# Altium PCB m12can.PcbDoc
Units mil, origin at the board's own origin, x right, y up, seen from the top; angles counter-clockwise.
Board outline 2000 x 2600 mil, 2 copper layers (Top Layer, Bottom Layer); 11 components, 44 nets, 65 pads, 8 vias.
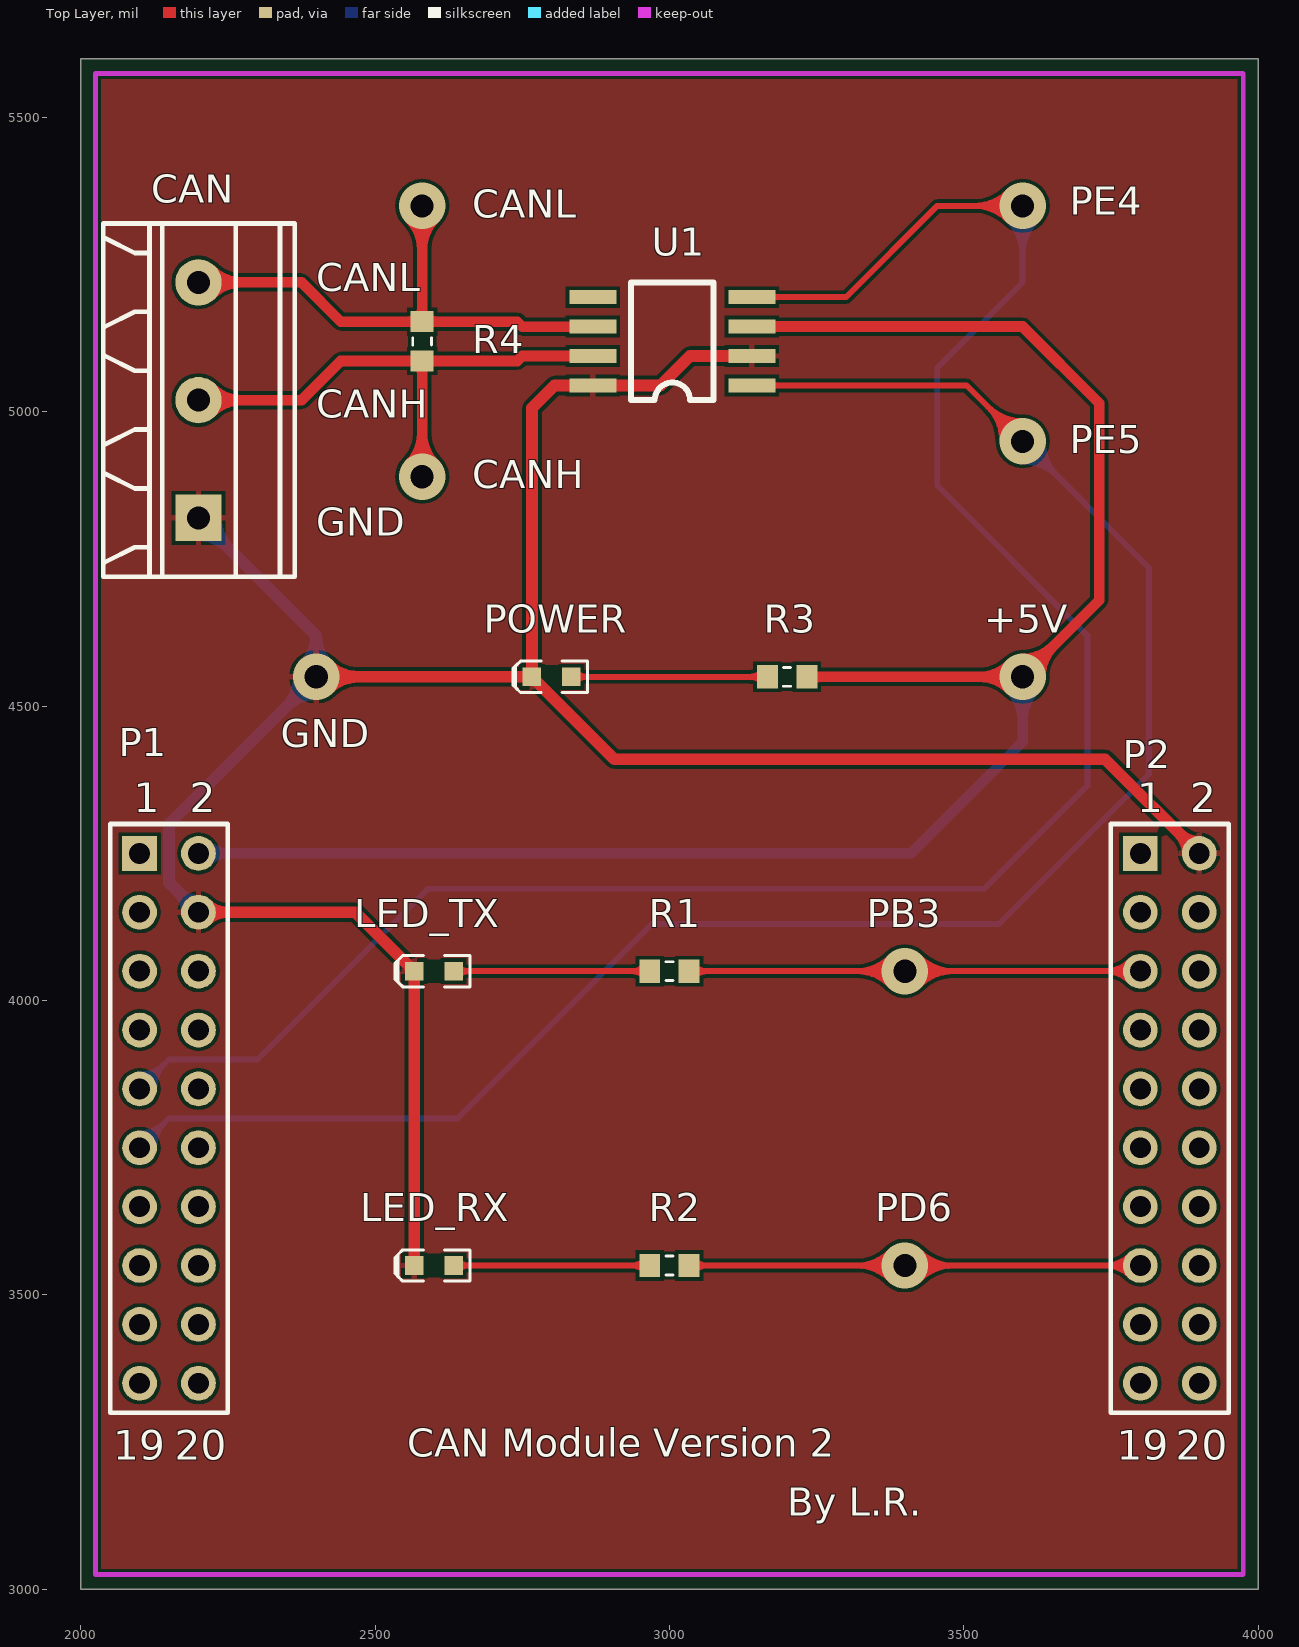
[diagram p0: Top Layer view]
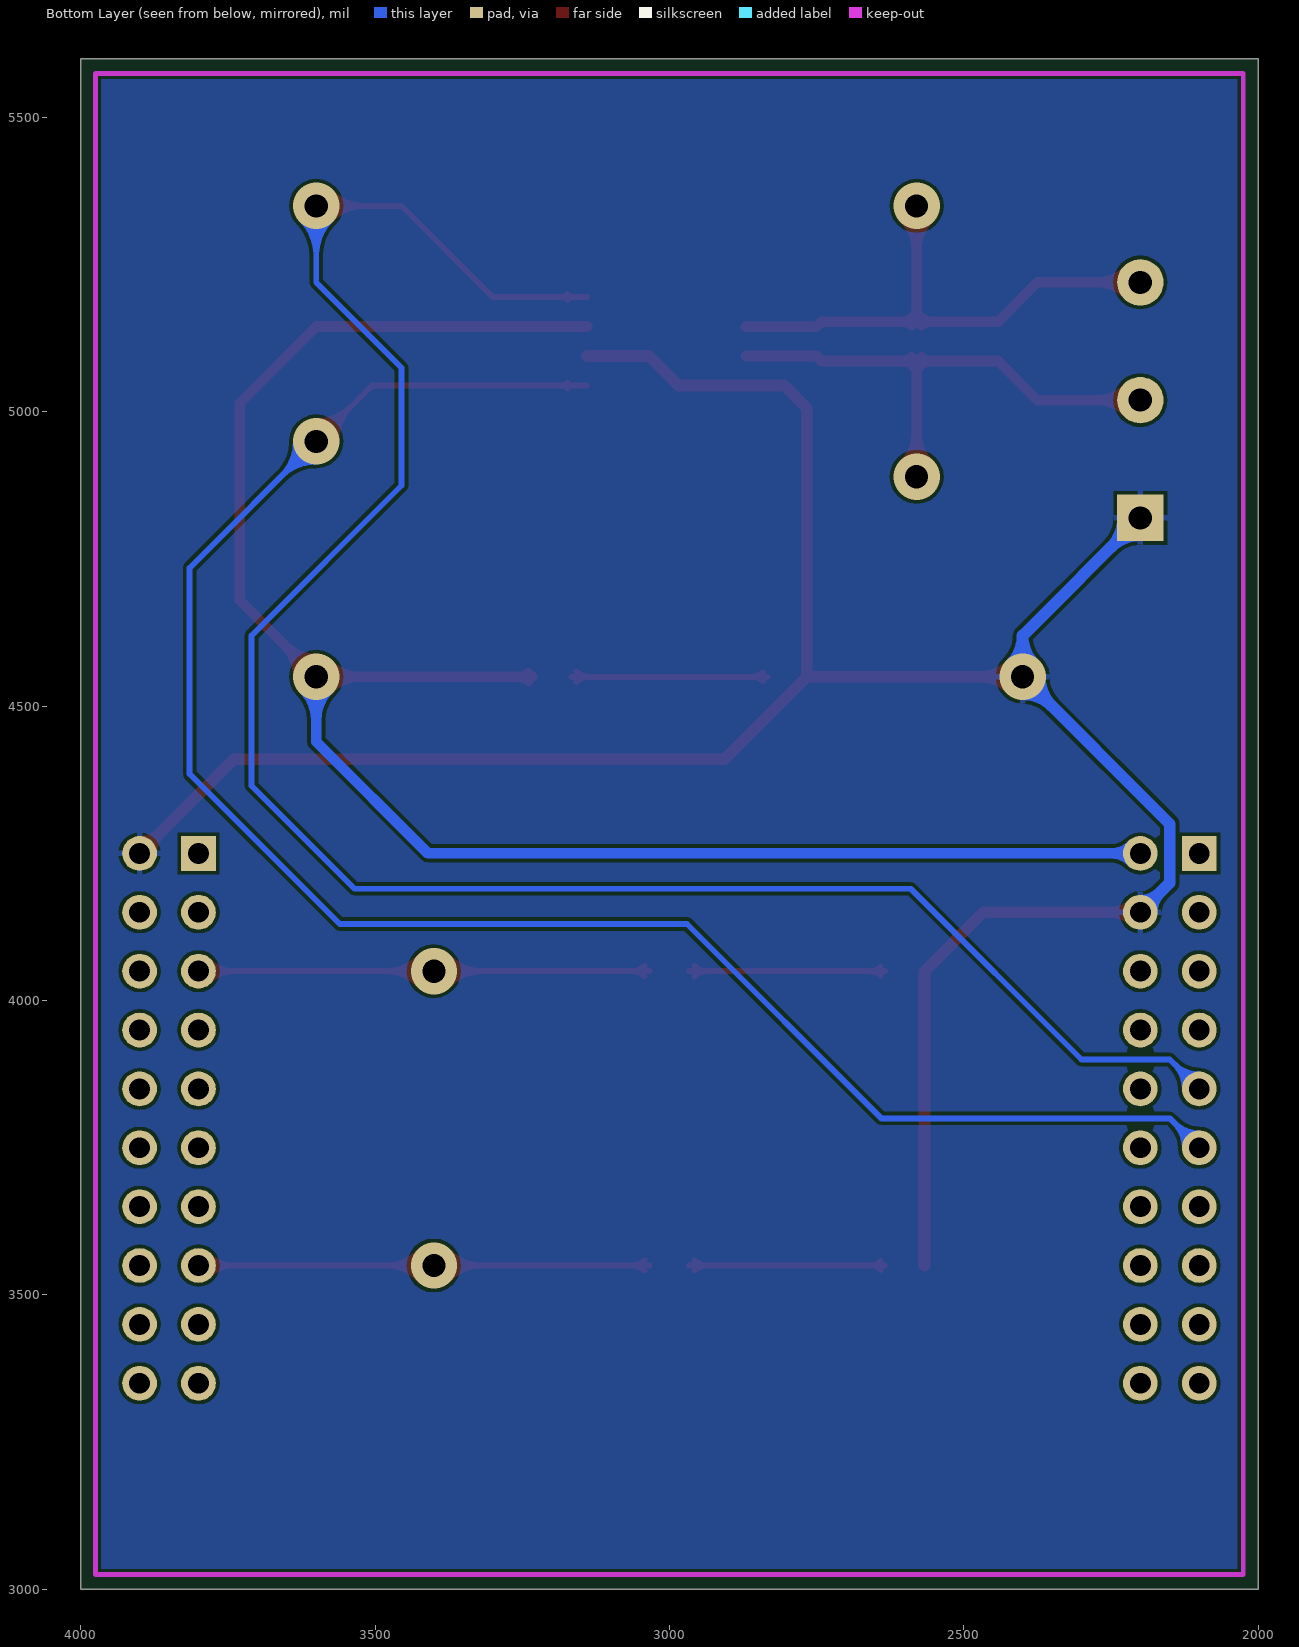
[diagram p1: Bottom Layer view, seen from below]
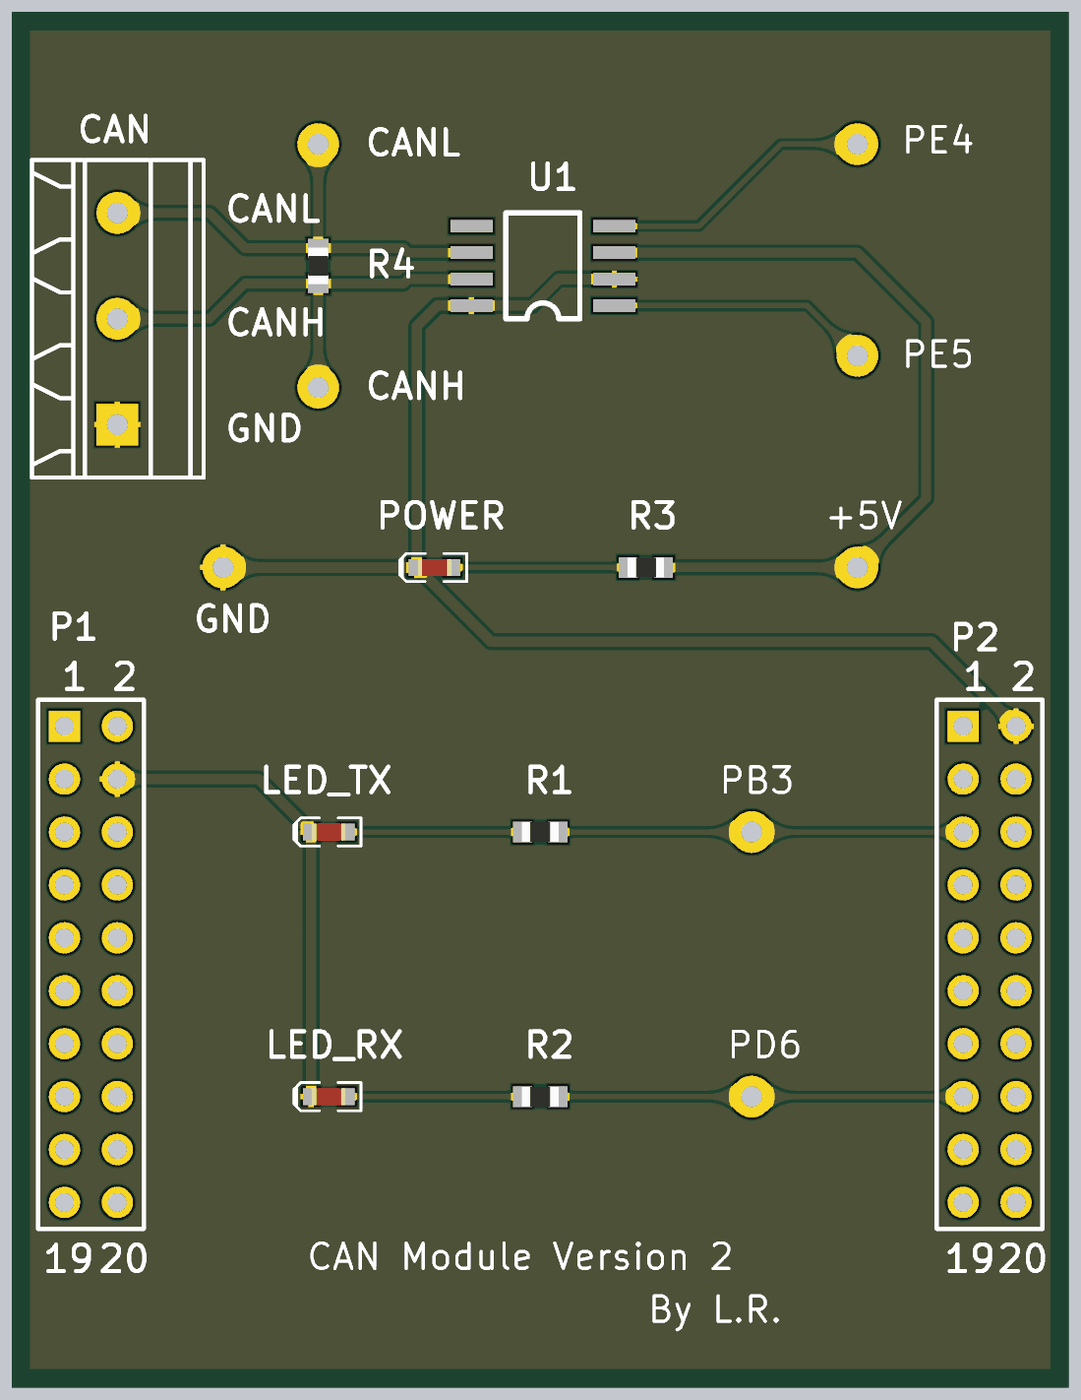
[diagram p2: 3D render of the assembled board from above, using the file's embedded part models]

## Layer stack, top to bottom
Top Layer: signal copper 1.4
Dielectric: dielectric 12.6, FR-4, Dk 4.8
Bottom Layer: signal copper 1.4

## Board outline
2000,3000 4000,3000 4000,5600 2000,5600

## Design rules (kind name [scope] priority, off if disabled: settings)
Clearance [All] p1: gap=6
PolygonConnect [All] p1: connectstyle=Relief reliefconductorwidth=10 reliefentries=4 polygonreliefangle="90 Angle"
RoutingVias VSS [InNet('GND')] p1: holewidth=20 width=32 viastyle="Through Hole" minholewidth=20 minwidth=32 maxholewidth=40 maxwidth=80
RoutingVias V5 [(InNet('CANH') OR InNet('CANL') OR InNet('VBUS'))] p2: holewidth=18 width=30 viastyle="Through Hole" minholewidth=18 minwidth=30 maxholewidth=40 maxwidth=80
RoutingVias [All] p3: holewidth=12 width=24 viastyle="Through Hole" minholewidth=12 minwidth=24 maxholewidth=40 maxwidth=80
SilkscreenOverComponentPads [All] p1: minsilkscreentomaskgap=10
SolderMaskExpansion [All] p1: expansion=4
Width GND [InNet('GND')] p1: maxlimit=22 minlimit=18 preferedwidth=20
Width VCC [(InNet('VBUS') OR InNet('CANH') OR InNet('CANL'))] p2: maxlimit=20 minlimit=16 preferedwidth=18
Width [All] p3: maxlimit=14 minlimit=6 preferedwidth=10
27 further rules are at their usual default settings.

## Components (designator, comment, footprint, x,y, rotation, side; value= is the part's Value field where it differs from the comment)
CAN "CAN" MKDSN_3RMI 2200,4820 r90 top
LED_RX "LED2" LED_0603_RED 2600,3550 r180 top
LED_TX "LED2" LED_0603_RED 2600,4050 r180 top
P1 "Header 10X2" HDR2X10 2100,4250 r270 top
P2 "Header 10X2" HDR2X10 3800,4250 r270 top
POWER "LED2" LED_0603_RED 2800,4550 r180 top
R1 "Res1" RES_0603 3000,4050 r180 top
R2 "Res1" RES_0603 3000,3550 r180 top
R3 "Res1" RES_0603 3200,4550 r180 top
R4 "Res1" RES_0603 2580,5120 r90 top
U1 "SN65HVD1050D" SOIC-8 3140,5045 r180 top

## Footprints (in the part's own frame and the unit in brackets; to place one, negate y for a bottom-side part, rotate by r counter-clockwise, add the part's x,y. Pads: shape width x height; smd on the part's side, far side on the other; paste and mask are expansions set on the pad)
HDR2X10 [mm] "Connector; Header; 10x2 Position"
  rect 1.5x1.5 hole 0.9: 1(0,0)
  round 1.5 hole 0.9: 2(0,2.54) 3(2.54,0) 4(2.54,2.54) 5(5.08,0) 6(5.08,2.54) 7(7.62,0) 8(7.62,2.54) 9(10.16,0) 10(10.16,2.54) 11(12.7,0) 12(12.7,2.54) 13(15.24,0) 14(15.24,2.54) 15(17.78,0) 16(17.78,2.54) 17(20.32,0) 18(20.32,2.54) 19(22.86,0) 20(22.86,2.54)
  silkscreen extent -1.27,-1.27 24.13,3.81
LED_0603_RED [mm]
  rect 0.8x0.8 smd: 1(-0.85,0) 2(0.85,0)
  Top Layer pour cut-out: -0.5,0.5 0.5,0.5 0.5,-0.5 -0.5,-0.5
  silkscreen extent -1.55,-0.68 1.68,0.67, body extent -0.8,-0.4 0.8,0.4, height 0.75
MKDSN_3RMI [mm]
  rect 2x2 hole 1: 1(0,0)
  round 2 hole 1: 2(5.08,0) 3(10.16,0)
  silkscreen extent -2.54,-4.15 12.7,4.11
RES_0603 [mm]
  rect 0.9x1 smd: 1(-0.85,0) 2(0.85,0)
  Top Layer pour cut-out: -0.4,0.6 0.4,0.6 0.4,-0.6 -0.4,-0.6
  silkscreen extent -0.15,-0.41 0.15,0.41, body extent -0.87,-0.47 0.88,0.48, height 0.54
SOIC-8 [mil]
  rect 80x24 smd: 1(0,0) 2(0,-50.06) 3(0,-100.06) 4(0,-150.06) 5(270,-150) 6(270,-100) 7(270,-50) 8(270,0)
  silkscreen extent 65,-175 205,25

## Part data
CAN: library part HEAD3
LED_RX LED_TX POWER: "Typical RED, GREEN, YELLOW, AMBER GaAs LED"
P1 P2: "Header, 10-Pin, Dual row"
R1 R2 R3 R4: "Resistor"
U1: "EMC OPTIMIZED CAN TRANSCEIVER,SN65HVD1050D"

## Via types
v1: diameter 78.74, hole 39.37, Top Layer to Bottom Layer, 8 vias

## Nets (pads, with @x,y where several pads share a name; then routed paths per layer and width w, separated by ;. In a path a pad name is that pad's centre, name@x,y a point inside that pad or via, vN(x,y) a via of type N, cw(c..) or ccw(c..) an arc to the next point about the centre after c; other vN are vias at no path point)
3V3: P1.1
CANH: CAN.2 R4.1 U1.7 | length 1227.1
  Top Layer w18: CAN.2 2375,5020 2441.53,5086.53 R4.1 ; CAN.2@2221.47,4998.53 cw(c2273.32,4946.68) 2273.32,5020 cw(c2273.32,5093.32) CAN.2@2221.47,5041.47 ; v1@2558.53,4911.47 ccw(c2506.68,4963.32) 2580,4963.32 ccw(c2653.32,4963.32) v1@2601.47,4911.47 ; R4.1@2571.87,5080.37 ccw(c2556.99,5065.49) 2556.99,5086.53 ccw(c2556.99,5107.58) R4.1@2571.87,5092.7 ; R4.1@2573.84,5080.37 cw(c2558.96,5065.49) 2580,5065.49 cw(c2601.04,5065.49) R4.1@2586.16,5080.37 ; v1(2580,4890) R4.1 ; R4.1@2588.13,5080.37 cw(c2603.01,5065.49) 2603.01,5086.53 cw(c2603.01,5107.58) R4.1@2588.13,5092.7 ; U1.7 2750,5095 2741.53,5086.53 R4.1
CANL: CAN.3 R4.2 U1.6 | length 1227.1
  Top Layer w18: CAN.3 2375,5220 2441.53,5153.47 R4.2 ; CAN.3@2221.47,5198.53 cw(c2273.32,5146.68) 2273.32,5220 cw(c2273.32,5293.32) CAN.3@2221.47,5241.47 ; v1@2558.53,5328.53 cw(c2506.68,5276.68) 2580,5276.68 cw(c2653.32,5276.68) v1@2601.47,5328.53 ; R4.2@2571.87,5147.3 ccw(c2556.99,5132.42) 2556.99,5153.47 ccw(c2556.99,5174.51) R4.2@2571.87,5159.63 ; R4.2@2573.84,5159.63 ccw(c2558.95,5174.51) 2580,5174.51 ccw(c2601.04,5174.51) R4.2@2586.16,5159.63 ; v1(2580,5350) R4.2 ; R4.2@2588.13,5147.3 cw(c2603.01,5132.42) 2603.01,5153.47 cw(c2603.01,5174.51) R4.2@2588.13,5159.63 ; U1.6 2750,5145 2741.53,5153.47 R4.2
GND: CAN.1 LED_RX.2 LED_TX.2 P1.4 P2.2 POWER.2 U1.2 U1.8 | length 4941.5
  Top Layer w20: P1.4 2466.54,4150 LED_TX.2 LED_RX.2 ; P1.4@2213.81,4136.19 cw(c2247.14,4102.86) 2247.14,4150 cw(c2247.14,4197.14) P1.4@2213.81,4163.81 ; v1(2400,4550) POWER.2 ; v1@2420.77,4529.23 cw(c2470.91,4479.09) 2470.91,4550 cw(c2470.91,4620.91) v1@2420.77,4570.77 ; U1.2 3035.06,5095.06 2985,5045 U1.8 2805,5045 2766.54,5006.54 POWER.2 ; P2.2@3880.47,4250 ccw(c3833.33,4250) 3866.66,4283.34 ccw(c3900,4316.67) P2.2@3900,4269.53 ; P2.2 3740,4410 2906.54,4410 POWER.2
  Bottom Layer w20: P1.4@2180.47,4150 ccw(c2133.33,4150) 2166.66,4183.34 ccw(c2200,4216.67) P1.4@2200,4169.53 ; P1.4 2150,4200 2150,4300 v1(2400,4550) 2400,4620 ; CAN.1@2200,4790.63 cw(c2200,4719.72) 2250.14,4769.86 cw(c2300.28,4820) CAN.1@2229.37,4820 ; CAN.1 2400,4620 ; v1@2370.63,4550 cw(c2299.72,4550) 2349.86,4499.86 cw(c2400,4449.72) v1@2400,4520.63 ; v1@2379.42,4570.96 ccw(c2331.27,4620) 2400,4620 ; v1@2420.58,4570.96 cw(c2468.73,4620) 2400,4620
NetLED_RX_1: LED_RX.1 R2.2 | length 422.1
  Top Layer w10: LED_RX.1 R2.2 ; LED_RX.1@2641.06,3542.4 cw(c2659.41,3524.05) 2659.41,3550 cw(c2659.41,3575.95) LED_RX.1@2641.06,3557.6 ; R2.2@2957.54,3541.01 ccw(c2935.83,3519.29) 2935.83,3550 ccw(c2935.84,3580.69) R2.2@2957.54,3558.99
NetLED_TX_1: LED_TX.1 R1.2 | length 422.1
  Top Layer w10: LED_TX.1 R1.2 ; LED_TX.1@2641.06,4042.4 cw(c2659.41,4024.05) 2659.41,4050 cw(c2659.41,4075.95) LED_TX.1@2641.06,4057.6 ; R1.2@2957.54,4041.01 ccw(c2935.83,4019.29) 2935.83,4050 ccw(c2935.84,4080.69) R1.2@2957.54,4058.99
NetPOWER_1: POWER.1 R3.2 | length 422.1
  Top Layer w10: POWER.1 R3.2 ; POWER.1@2841.06,4542.4 cw(c2859.41,4524.05) 2859.41,4550 cw(c2859.41,4575.95) POWER.1@2841.06,4557.6 ; R3.2@3157.54,4541.01 ccw(c3135.83,4519.29) 3135.83,4550 ccw(c3135.84,4580.69) R3.2@3157.54,4558.99
PA2: P2.20
PA3: P2.18
PA4: P2.16
PA5: P1.15
PA6: P1.17
PA7: P1.19
PB0: P1.5
PB1: P1.7
PB2: P2.4
PB3: P2.5 R1.1 | length 1408.4
  Top Layer w10: R1.1 v1(3400,4050) P2.5 ; R1.1@3042.46,4041.01 cw(c3064.17,4019.3) 3064.17,4050 cw(c3064.17,4080.7) R1.1@3042.46,4058.99 ; 3317.02,4050 ccw(c3317.02,4132.98) v1@3375.7,4074.3 ; 3317.03,4050 cw(c3317.03,3967.03) v1@3375.7,4025.7 ; v1@3382.77,4032.77 ccw(c3341.17,3991.17) 3341.17,4050 ccw(c3341.16,4108.84) v1@3382.77,4067.23 ; v1@3417.23,4032.77 cw(c3458.83,3991.17) 3458.83,4050 cw(c3458.83,4108.83) v1@3417.23,4067.23 ; v1@3424.3,4025.7 cw(c3482.98,3967.02) 3482.98,4050 cw(c3482.98,4132.98) v1@3424.3,4074.3 ; P2.5@3782.66,4032.66 ccw(c3740.79,3990.79) 3740.79,4050 ccw(c3740.79,4109.21) P2.5@3782.66,4067.34 ; P2.5@3789.73,4039.73 ccw(c3764.93,4014.93) 3764.93,4050 ccw(c3764.93,4085.07) P2.5@3789.73,4060.27
PB4: P1.13
PB5: P1.3
PB6: P2.14
PB7: P2.12
PC4: P2.7
PC5: P2.9
PC6: P2.11
PC7: P2.13
PD0: P1.6
PD1: P1.8
PD2: P1.10
PD3: P1.12
PD6: P2.15 R2.1 | length 1408.4
  Top Layer w10: R2.1 P2.15 ; R2.1@3042.46,3541.01 cw(c3064.17,3519.3) 3064.17,3550 cw(c3064.17,3580.7) R2.1@3042.46,3558.99 ; v1@3375.7,3525.7 ccw(c3317.02,3467.02) 3317.02,3550 ccw(c3317.02,3632.98) v1@3375.7,3574.3 ; v1@3382.77,3532.77 ccw(c3341.17,3491.16) 3341.17,3550 ccw(c3341.17,3608.83) v1@3382.77,3567.23 ; v1@3417.23,3532.77 cw(c3458.83,3491.16) 3458.83,3550 cw(c3458.83,3608.83) v1@3417.23,3567.23 ; v1@3424.3,3525.7 cw(c3482.98,3467.02) 3482.98,3550 cw(c3482.98,3632.98) v1@3424.3,3574.3 ; P2.15@3782.66,3532.66 ccw(c3740.79,3490.79) 3740.79,3550 ccw(c3740.78,3609.22) P2.15@3782.66,3567.34 ; P2.15@3789.73,3539.73 ccw(c3764.93,3514.93) 3764.93,3550 ccw(c3764.93,3585.07) P2.15@3789.73,3560.27
  other v1: 3400,3550
PD7: P2.17
PE0: P2.6
PE1: P1.14
PE2: P1.16
PE3: P1.18
PE4: P1.9 U1.4 | length 4118.3
  Top Layer w10: U1.4 3300.06,5195.06 3455,5350 v1(3600,5350) ; U1.4@3172.95,5190.11 cw(c3184.9,5178.16) 3184.9,5195.06 cw(c3184.9,5211.96) U1.4@3172.95,5200.01 ; v1@3575.7,5325.7 ccw(c3517.02,5267.02) 3517.02,5350 ccw(c3517.02,5432.98) v1@3575.7,5374.3 ; v1@3582.77,5332.77 ccw(c3541.17,5291.17) 3541.17,5350 ccw(c3541.17,5408.83) v1@3582.77,5367.23
  Bottom Layer w10: P1.9 2150,3900 2300,3900 2590,4190 3535,4190 3710,4365 3710,4620 3455,4875 3455,5075 3600,5220 v1(3600,5350) ; P1.9@2100,3864.53 ccw(c2100,3899.6) 2124.8,3874.8 ccw(c2149.6,3850) P1.9@2114.53,3850 ; P1.9@2100,3874.53 ccw(c2100,3933.74) 2141.87,3891.87 ccw(c2183.74,3850) P1.9@2124.53,3850 ; v1@3575.7,5325.7 cw(c3517.02,5267.02) 3600,5267.02 cw(c3682.98,5267.02) v1@3624.3,5325.7 ; v1@3582.77,5332.77 cw(c3541.17,5291.17) 3600,5291.17 cw(c3658.83,5291.17) v1@3617.23,5332.77
PE5: P1.11 U1.1 | length 3751.6
  Top Layer w10: U1.1 3505,5045 v1(3600,4950) ; U1.1@3172.95,5040.05 cw(c3184.9,5028.1) 3184.9,5045 cw(c3184.9,5061.9) U1.1@3172.95,5049.95 ; v1@3565.63,4950 ccw(c3482.65,4950) 3541.33,5008.67 ccw(c3600,5067.35) v1@3600,4984.37 ; v1@3575.63,4950 ccw(c3516.8,4950) 3558.4,4991.6 ccw(c3600,5033.2) v1@3600,4974.37
  Bottom Layer w10: P1.11 2150,3800 2640,3800 2970,4130 3560,4130 3815,4385 3815,4735 v1(3600,4950) ; P1.11@2100,3764.53 ccw(c2100,3799.6) 2124.8,3774.8 ccw(c2149.6,3750) P1.11@2114.53,3750 ; P1.11@2100,3774.53 ccw(c2100,3833.74) 2141.87,3791.87 ccw(c2183.74,3750) P1.11@2124.53,3750 ; v1@3600,4915.63 cw(c3600,4832.65) 3658.67,4891.33 cw(c3717.35,4950) v1@3634.37,4950 ; v1@3600,4925.63 cw(c3600,4866.8) 3641.6,4908.4 cw(c3683.2,4950) v1@3624.37,4950
PF0: P2.8
PF1: P1.20
PF2: P2.1
PF3: P2.3
PF4: P2.19
RST: P2.10
VBUS: P1.2 R3.1 U1.3 | length 3574.4
  Top Layer w18: U1.3 3599.94,5145.06 3730,5015 3730,4680 v1(3600,4550) R3.1 ; R3.1@3239.63,4543.84 cw(c3254.51,4528.96) 3254.51,4550 cw(c3254.51,4571.04) R3.1@3239.63,4556.16 ; v1@3578.53,4528.53 ccw(c3526.68,4476.68) 3526.68,4550 ccw(c3526.68,4623.32) v1@3578.53,4571.47 ; v1@3600,4580.37 ccw(c3600,4653.69) 3651.84,4601.85 ccw(c3703.69,4550) v1@3630.37,4550
  Bottom Layer w18: P1.2 3410,4250 3600,4440 v1(3600,4550) ; P1.2@2214.52,4235.48 cw(c2249.56,4200.44) 2249.56,4250 cw(c2249.56,4299.56) P1.2@2214.52,4264.52 ; v1@3578.53,4528.53 cw(c3526.68,4476.68) 3600,4476.68 cw(c3673.32,4476.68) v1@3621.47,4528.53
pads on no net: U1.5

## Polygon pours and split planes (outlines as drawn)
GND on Top Layer "Bottom Layer-No Net" (solid, remove dead copper, pour order 1000): 2000,5600 2000,3000 4000,3000 4000,5600
GND on Bottom Layer "Bottom Layer-No Net" (solid, remove dead copper, pour order 1001): 2000,5600 2000,3000 4000,3000 4000,5600

## Keep-outs
Keep-Out Layer:
  lines w8: 2025,3025 3975,3025 3975,5575 2025,5575 2025,3025

## Silkscreen, mask and mechanical layers (free items; w line width, h text height)
Top Overlay:
  text "PE4" at 3680,5335 h48
  text "CANL" at 2665,5330 h48
  text "CANL" at 2400,5205 h48
  text "CANH" at 2400,4990 h48
  text "PE5" at 3680,4930 h48
  text "CANH" at 2665,4870 h48
  text "GND" at 2400,4790 h48
  text "+5V" at 3535,4625 h48
  text "GND" at 2340,4430 h48
  text "PB3" at 3335,4125 h48
  text "PD6" at 3350,3625 h48
  text "CAN Module Version 2" at 2555,3225 h48
  text "By L.R." at 3200,3125 h48

## Text inside footprints (layer, text, board x,y; h text height)
P1: Top Overlay "2" at 2185,4320 h50; Top Overlay "1" at 2090,4320 h50; Top Overlay "19" at 2055,3220 h50; Top Overlay "20" at 2160,3220 h50
P2: Top Overlay "2" at 3885,4320 h50; Top Overlay "1" at 3795,4320 h50; Top Overlay "19" at 3760,3220 h50; Top Overlay "20" at 3860,3220 h50